# Altium PCB fpc.PcbDoc
Units mil, origin at the board's own origin, x right, y up, seen from the top; angles counter-clockwise.
Board outline 1811.02 x 3149.61 mil, 2 copper layers (Top Layer, Bottom Layer), stack 4.8 mil thick; 4 components, 30 nets, 86 pads, 2 vias.
Unrouted connection lines stored in the file: 36.
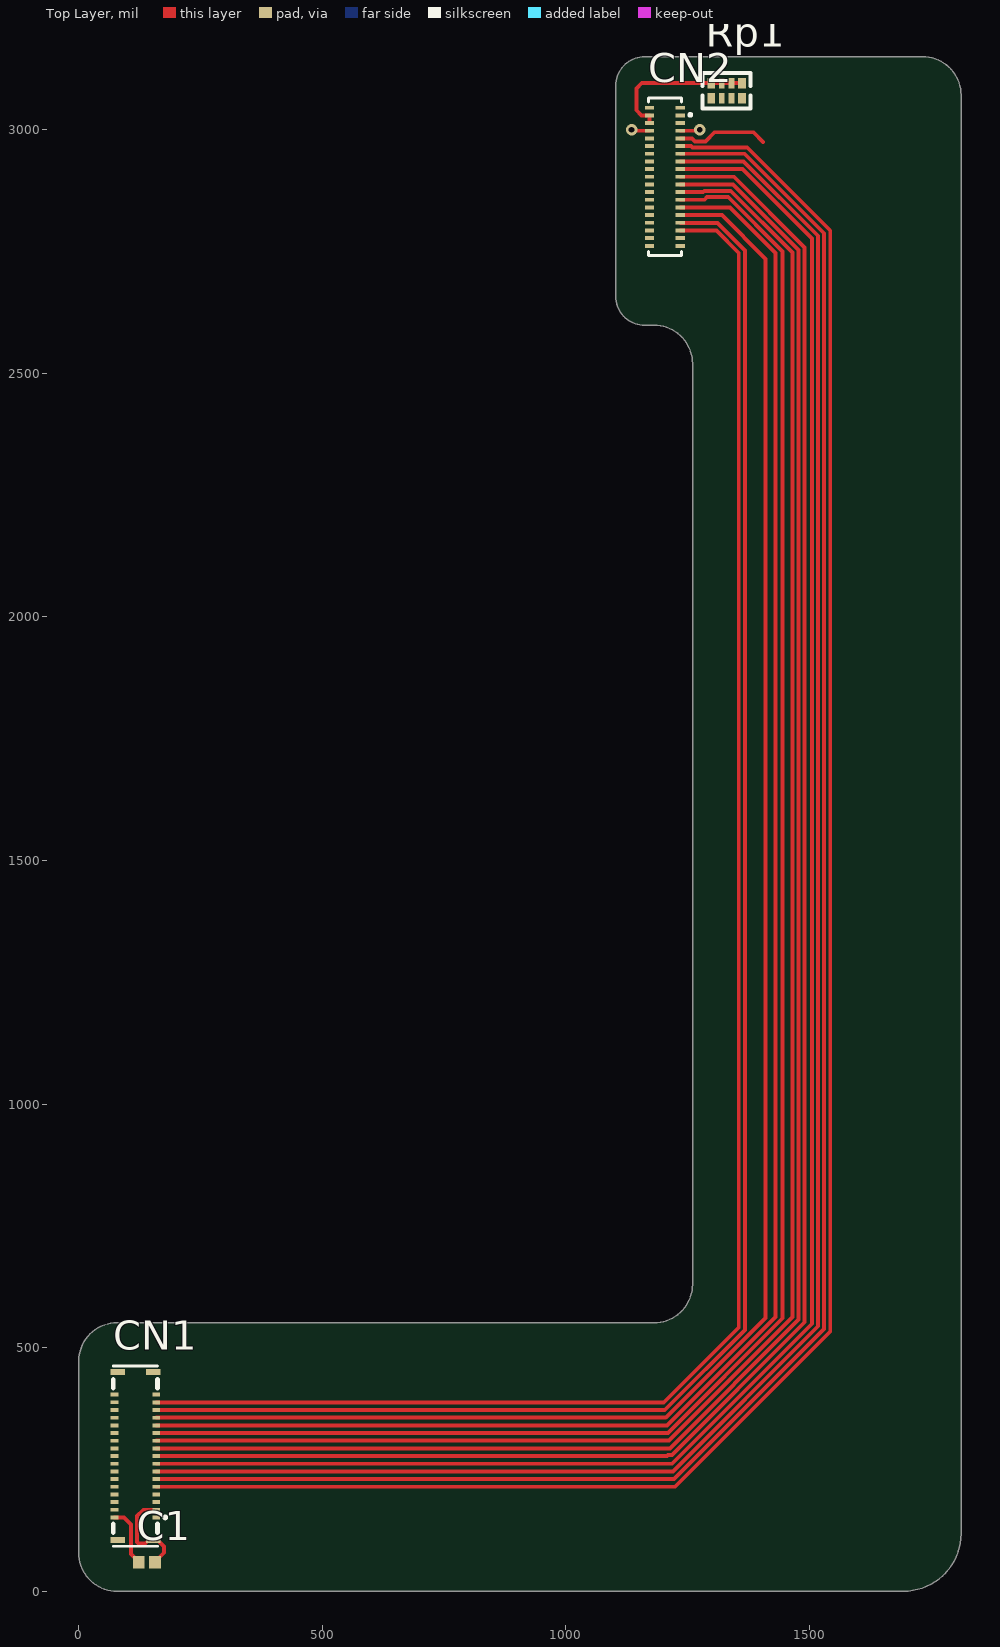
[diagram p0: Top Layer view]
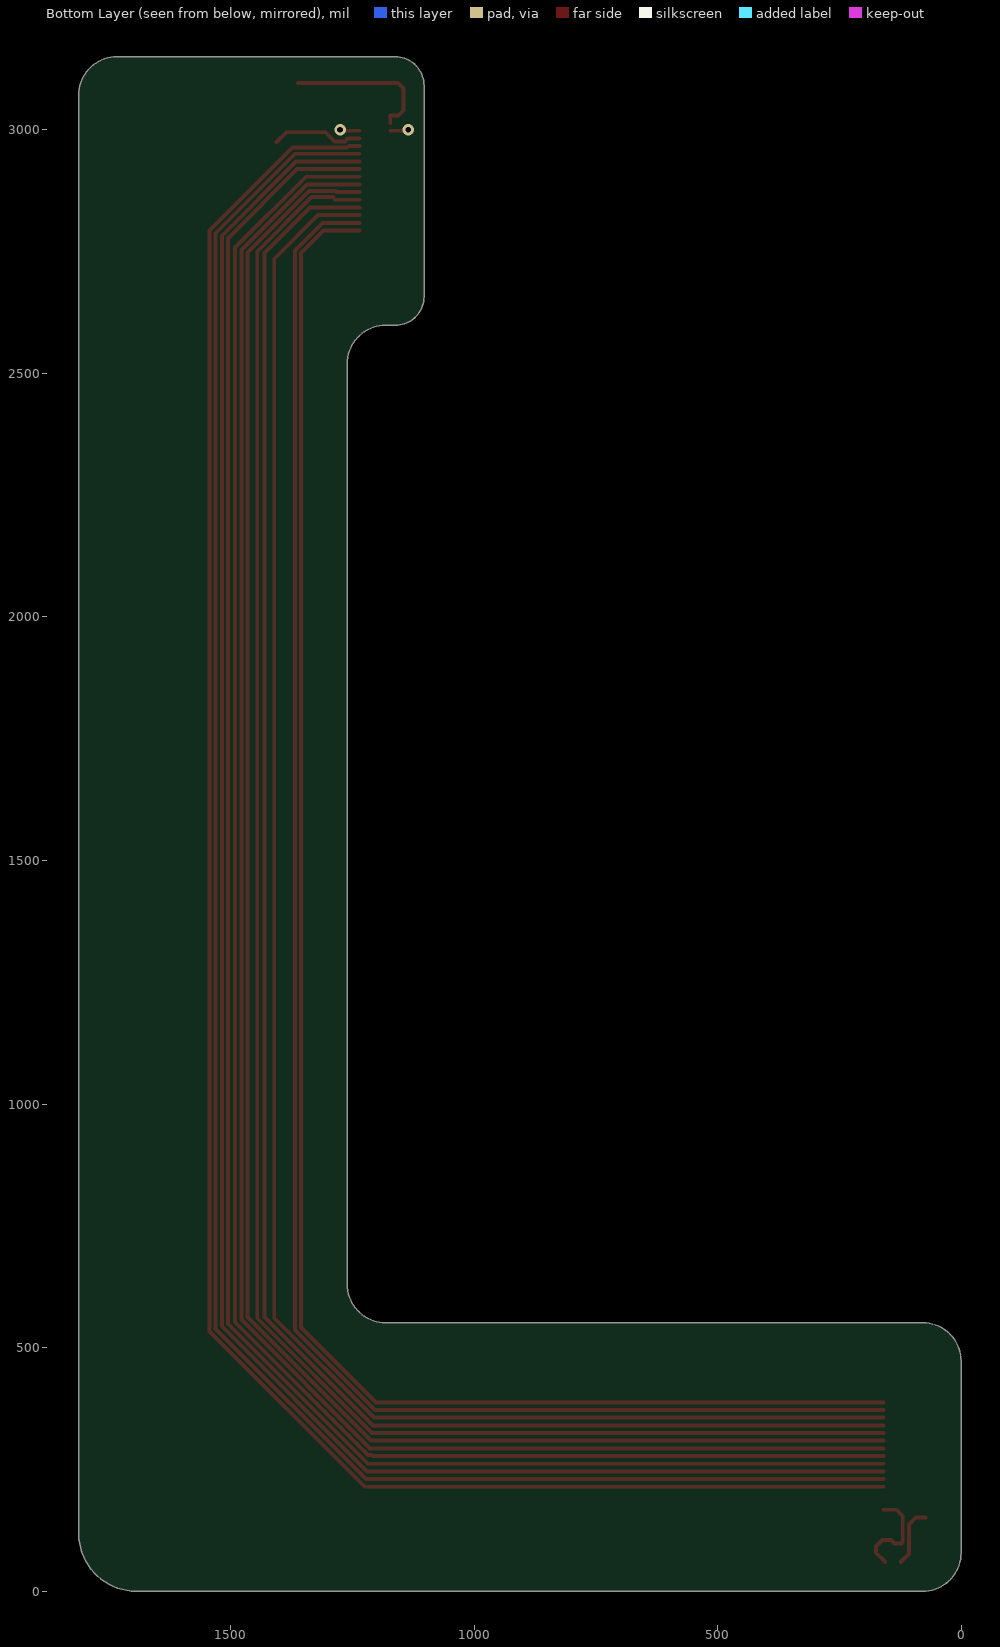
[diagram p1: Bottom Layer view, seen from below]

## Layer stack, top to bottom
Top Solder: solder mask 0.4, Solder Resist, Dk 3.5
Top Layer: signal copper 1.4
Dielectric 1: prepreg 2, PP-001, Dk 3.9
Bottom Layer: signal copper 1.4
Bottom Solder: solder mask 0.4, Solder Resist, Dk 3.5

## Board outline
78.99,0.25 cw(c78.99,78.99) 0.25,78.99 0.25,472.69 cw(c78.99,472.69) 78.99,551.43 1181.35,551.43 ccw(c1181.35,630.17) 1260.09,630.17 1260.09,2519.93 ccw(c1181.35,2519.93) 1181.35,2598.68 1161.67,2598.68 cw(c1161.67,2657.73) 1102.61,2657.73 1102.61,3090.8 cw(c1161.67,3090.8) 1161.67,3149.86 1732.53,3149.86 cw(c1732.53,3071.12) 1811.27,3071.12 1811.27,118.36 cw(c1693.16,118.36) 1693.16,0.25

## Design rules (kind name [scope] priority, off if disabled: settings)
Clearance [All] p1: gap=7.87 ignorepadtopadclearanceinfootprint=TRUE except(4.61: Arc-Arc Arc-Track Arc-SMDPad Arc-THPad Arc-Text Arc-Hole Track-Track Track-SMDPad Track-THPad Track-Text Track-Hole SMDPad-SMDPad SMDPad-THPad SMDPad-Text SMDPad-Hole THPad-THPad THPad-Text THPad-Hole Fill-Text Fill-Hole Poly-Text Poly-Hole Region-Text Region-Hole Text-Text Text-Hole)
DiffPairsRouting [All] p1: maxlimit=10 minlimit=10 mostfreqgap=10 substack1={15A85CE2-7193-4F4A-B86C-24CA8B0F3328} toplayer_{15a85ce2-7193-4f4a-b86c-24ca8b0f3328}_minwidth=15 toplayer_{15a85ce2-7193-4f4a-b86c-24ca8b0f3328}_maxwidth=15 toplayer_{15a85ce2-7193-4f4a-b86c-24ca8b0f3328}_prefwidth=15 bottomlayer_{15a85ce2-7193-4f4a-b86c-24ca8b0f3328}_minwidth=15 bottomlayer_{15a85ce2-7193-4f4a-b86c-24ca8b0f3328}_maxwidth=15 bottomlayer_{15a85ce2-7193-4f4a-b86c-24ca8b0f3328}_prefwidth=15 toplayer_minwidth=15 toplayer_maxwidth=15 toplayer_prefwidth=15 bottomlayer_minwidth=15 bottomlayer_maxwidth=15 bottomlayer_prefwidth=15 maxuncoupledlength=500
HoleSize [All] p1: absolutevalues=TRUE maxlimit=196.85 minlimit=1 maxpercent=80.000 minpercent=20.000
MinimumSolderMaskSliver [All] p1: minsoldermaskwidth=0
PolygonConnect [All] p1: thpad.connectstyle=Relief thpad.reliefconductorwidth=10 thpad.reliefentries=4 thpad.polygonreliefangle="90 Angle" thpad.airgapwidth=10 smdpad.connectstyle=Relief smdpad.reliefconductorwidth=10 smdpad.reliefentries=4 smdpad.polygonreliefangle="90 Angle" smdpad.airgapwidth=10 via.connectstyle=Direct via.reliefconductorwidth=10 via.reliefentries=4 via.polygonreliefangle="90 Angle" via.airgapwidth=10
RoutingVias [All] p1: holewidth=11.81 width=23.62 viastyle="Through Hole" minholewidth=11.81 minwidth=23.62 maxholewidth=11.81 maxwidth=23.62
SilkToSilkClearance [All] p1: silktosilkclearance=0
SilkToSolderMaskClearance [IsPad] p1: minsilkscreentomaskgap=0 clearancetoexposedcopper=TRUE
SolderMaskExpansion [All] p1: expansion=4 istentingtop=FALSE
Width [All] p1: maxlimit=19.68 minlimit=4 preferedwidth=7.87 substack1={15A85CE2-7193-4F4A-B86C-24CA8B0F3328}
25 further rules are at their usual default settings.

## Components (designator, comment, footprint, x,y, rotation, side; value= is the part's Value field where it differs from the comment)
C1 "100nF (104) 10% 16V" LC-0402_C_NOSILK 140,60 r0 top
CN1 "BM20B(0.8)-34DS-0.4V(51)" CONN-SMD_34P-P0.40_BM20B-0.8-34DS-0.4V-51 116.42,277.76 r90 top
CN2 "BM20B(0.8)-34DP-0.4V(51)" CONN-SMD_34P-P0.40_BM20B-0.8-34DP-0.4V-51 1203.5,2903.51 r90 top
Rp1 "10KΩ (103) ±5%" 0402_Rx4 1330,3080 r0 top

## Footprints (in the part's own frame and the unit in brackets; to place one, negate y for a bottom-side part, rotate by r counter-clockwise, add the part's x,y. Pads: shape width x height; smd on the part's side, far side on the other; paste and mask are expansions set on the pad)
0402_Rx4 [mm]
  rect 0.4x0.55 smd mask+0.051: 1(-0.8,-0.4) 4(0.8,-0.4) 5(0.8,0.4) 8(-0.8,0.4)
  rect 0.3x0.55 smd mask+0.051: 2(-0.25,-0.4) 3(0.25,-0.4) 6(0.25,0.4) 7(-0.25,0.4)
  silkscreen extent -1.25,-0.93 1.25,0.92, body extent -1,-0.5 1,0.5, height 0.45
CONN-SMD_34P-P0.40_BM20B-0.8-34DP-0.4V-51 [mm]
  rect 0.2x0.48 smd: 1(3.2,-0.8) 2(3.2,0.8) 3(2.8,-0.8) 4(2.8,0.8) 5(2.4,-0.8) 6(2.4,0.8) 7(2,-0.8) 8(2,0.8) 9(1.6,-0.8) 10(1.6,0.8) 11(1.2,-0.8) 12(1.2,0.8) 13(0.8,-0.8) 14(0.8,0.8) 15(0.4,-0.8) 16(0.4,0.8) 17(0,-0.8) 18(0,0.8) 19(-0.4,-0.8) 20(-0.4,0.8) 21(-0.8,-0.8) 22(-0.8,0.8) 23(-1.2,-0.8) 24(-1.2,0.8) 25(-1.6,-0.8) 26(-1.6,0.8) 27(-2,-0.8) 28(-2,0.8) 29(-2.4,-0.8) 30(-2.4,0.8) 31(-2.8,-0.8) 32(-2.8,0.8) 33(-3.2,-0.8) 34(-3.2,0.8) 35(-3.6,-0.8) 36(-3.6,0.8) 37(3.6,-0.8) 38(3.6,0.8)
  silkscreen extent -4.1,-1.4 4.1,0.86, body extent -4.07,-0.94 4.13,0.84, height 0.63
CONN-SMD_34P-P0.40_BM20B-0.8-34DS-0.4V-51 [mm]
  rect 0.2x0.4 smd: 1(-3.2,-1.09) 2(-3.2,1.09) 3(-2.8,-1.09) 4(-2.8,1.09) 5(-2.4,-1.09) 6(-2.4,1.09) 7(-2,-1.09) 8(-2,1.09) 9(-1.6,-1.09) 10(-1.6,1.09) 11(-1.2,-1.09) 12(-1.2,1.09) 13(-0.8,-1.09) 14(-0.8,1.09) 15(-0.4,-1.09) 16(-0.4,1.09) 17(0,-1.09) 18(0,1.09) 19(0.4,-1.09) 20(0.4,1.09) 21(0.8,-1.09) 22(0.8,1.09) 23(1.2,-1.09) 24(1.2,1.09) 25(1.6,-1.09) 26(1.6,1.09) 27(2,-1.09) 28(2,1.09) 29(2.4,-1.09) 30(2.4,1.09) 31(2.8,-1.09) 32(2.8,1.09) 33(3.2,-1.09) 34(3.2,1.09)
  rect 0.3x0.75 smd: 35(4.375,-0.925) 36(4.375,0.925) 37(-4.375,-0.925) 38(-4.375,0.925)
  silkscreen extent -4.7,-1.64 4.7,1.15, body extent -4.64,-1.17 4.64,1.13, height 0.77
LC-0402_C_NOSILK [mm]
  rect 0.6x0.65 smd mask+0.051: 1(-0.425,0) 2(0.425,0)
  body extent -0.48,-0.3 0.52,0.3, height 0.2

## Part data
C1: library part "0402 100nF (104) 10% 16V", "贴片电容", Package=0402, SuppliersPartNumber=C1525, ComponentLink1Description=供应商链接, ComponentLink1URL=http://www.szlcsc.com/product/details_1877.html, Supplier=LC
CN1: "0.4mm BTB连接器-34P 母", BOM_JLCPCB Part Class="Extended Part", BOM_Manufacturer=HRS(广濑), BOM_Manufacturer Part=BM20B(0.8)-34DS-0.4V(51), BOM_Supplier=LCSC, BOM_Supplier Part=C424541, Contributor=LCSC, spicePre=C, spiceSymbolName=BM20B(0.8)-34DS-0.4V(51)
CN2: "0.4mm BTB连接器-34P 公", BOM_JLCPCB Part Class="Extended Part", BOM_Manufacturer=HRS(广濑), BOM_Manufacturer Part=BM20B(0.8)-34DP-0.4V(51), BOM_Supplier=LCSC, BOM_Supplier Part=C424540, Contributor=LCSC, spicePre=C, spiceSymbolName=BM20B(0.8)-34DP-0.4V(51)
Rp1: library part "0402*4 10KΩ (103) 5%", "贴片排阻", Package=0402*4, SuppliersPartNumber=C25725, ComponentLink1Description=供应商链接, ComponentLink1URL=http://www.szlcsc.com/product/details_26468.html, Supplier=LC

## Via types
v1: diameter 23.62, hole 11.81, Top Layer to Bottom Layer, 2 vias

## Nets (pads, with @x,y where several pads share a name; then routed paths per layer and width w, separated by ;. In a path a pad name is that pad's centre, name@x,y a point inside that pad or via, vN(x,y) a via of type N, cw(c..) or ccw(c..) an arc to the next point about the centre after c; other vN are vias at no path point)
GND: C1.2 CN1.1 CN1.3 CN1.33 CN1.34 CN1.35 CN1.36 CN1.37 CN1.38 CN2.1 CN2.3 CN2.33 CN2.34 CN2.35 CN2.36 CN2.37 CN2.38 | length 203
  Top Layer w8: C1.2 156.73,60.98 175,79.25 175,92.2 161.69,105.51 CN1.37 143.97,105.51 136.63,98.17 122.83,98.17 120,101 120,155 132.52,167.52 CN1.3
I2C0_SCL: CN1.5 CN2.5 Rp1.1 | length 40.8
  Top Layer w8: CN2.5 1235.06,2998.05 1273.06,2998.05 v1(1275,3000)
I2C0_SDA: CN1.6 CN2.6 Rp1.2 | length 37.8
  Top Layer w8: v1(1135,3000) 1136.94,2998.05 1171.94,2998.05 CN2.6
I2C1_SCL: CN1.31 CN2.31 Rp1.3 | length 3603.8
  Top Layer w8: CN1.31 1201.02,387.99 1355,541.97 1355,2747.17 1308.9,2793.27 CN2.31
I2C1_SDA: CN1.32 CN2.32 Rp1.4
LED_P0: CN1.23 CN2.23 | length 3831.1
  Top Layer w8: CN1.23 1209.35,325 1445,560.66 1445,2750 1333.31,2861.69 1289.59,2861.69 1284.17,2856.26 CN2.23
LED_P1: CN1.25 CN2.25 | length 3780.3
  Top Layer w8: CN1.25 1207.26,340.74 1430,563.48 1430,2747.17 1336.66,2840.51 CN2.25
LED_P2: CN1.27 CN2.27 | length 3721.4
  Top Layer w8: CN1.27 1205.18,356.49 1410,561.31 1410,2735 1320.24,2824.76 CN2.27
LED_P3: CN1.29 CN2.29 | length 3648.1
  Top Layer w8: CN1.29 1203.1,372.24 1367.61,536.75 1367.61,2752.39 1310.98,2809.02 CN2.29
LED_P4: CN1.24 CN2.24
LED_P5: CN1.26 CN2.26
LED_P6: CN1.28 CN2.28
LED_P7: CN1.30 CN2.30
MAG0_INT: CN1.7 CN2.7 | length 188.5
  Top Layer w8: CN2.7 1259.26,2982.24 1265.19,2976.32 1286.32,2976.32 1305,2995 1385,2995 1405,2975
MAG0_TRIG: CN1.8 CN2.8
MAG1_INT: CN1.9 CN2.9 | length 4154.5
  Top Layer w8: CN1.9 1223.9,214.76 1542.82,533.68 1542.82,2792.84 1372.3,2963.35 1260.32,2963.35 1257.18,2966.5 CN2.9
MAG1_TRIG: CN1.10 CN2.10
MAG2_INT: CN1.11 CN2.11 | length 4110.1
  Top Layer w8: CN1.11 1221.82,230.51 1530.21,538.9 1530.21,2787.62 1367.08,2950.75 CN2.11
MAG2_TRIG: CN1.12 CN2.12
MAG3_INT: CN1.13 CN2.13 | length 4065.8
  Top Layer w8: CN1.13 1219.75,246.26 1517.61,544.12 1517.61,2782.39 1365,2935 CN2.13
MAG3_TRIG: CN1.14 CN2.14
MAG4_INT: CN1.15 CN2.15 | length 4021.4
  Top Layer w8: CN1.15 1217.66,262 1505,549.34 1505,2777.17 1362.92,2919.25 CN2.15
MAG4_TRIG: CN1.16 CN2.16
MAG5_INT: CN1.17 CN2.17 | length 3965.9
  Top Layer w8: CN1.17 1207.75,277.75 1210,280 1217.83,280 1490.21,552.38 1490.21,2758.27 1344.98,2903.5 CN2.17
MAG5_TRIG: CN1.18 CN2.18
MAG6_INT: CN1.19 CN2.19 | length 3921.5
  Top Layer w8: CN1.19 1213.5,293.5 1477.61,557.61 1477.61,2753.05 1342.9,2887.76 CN2.19
MAG6_TRIG: CN1.20 CN2.20
MAG7_INT: CN1.21 CN2.21 | length 3879
  Top Layer w8: CN1.21 1211.42,309.25 1465,562.83 1465,2747.83 1338.54,2874.29 1284.37,2874.29 1282.09,2872.01 CN2.21
MAG7_TRIG: CN1.22 CN2.22
VCC_3V3: C1.1 CN1.2 CN1.4 CN2.2 CN2.4 Rp1.5 Rp1.6 Rp1.7 Rp1.8 | length 437
  Top Layer w8: CN1.2 93.22,151.78 107.39,137.61 107.39,76.86 123.27,60.98 C1.1 ; CN2.4 CN2.2 1171.94,3029.55 1155.45,3029.55 1145,3040 1145,3085 1155.75,3095.75 Rp1.8 Rp1.7 Rp1.6 Rp1.5

## Silkscreen, mask and mechanical layers (free items; w line width, h text height)
Mechanical 1:
  the board outline again, w0.5